# Altium PCB PCB.PcbDoc
Units mil, origin at the board's own origin, x right, y up, seen from the top; angles counter-clockwise.
Board outline 1885.08 x 820.03 mil, 2 copper layers (Top Layer, Bottom Layer); 23 components, 13 nets, 65 pads, 4 vias.
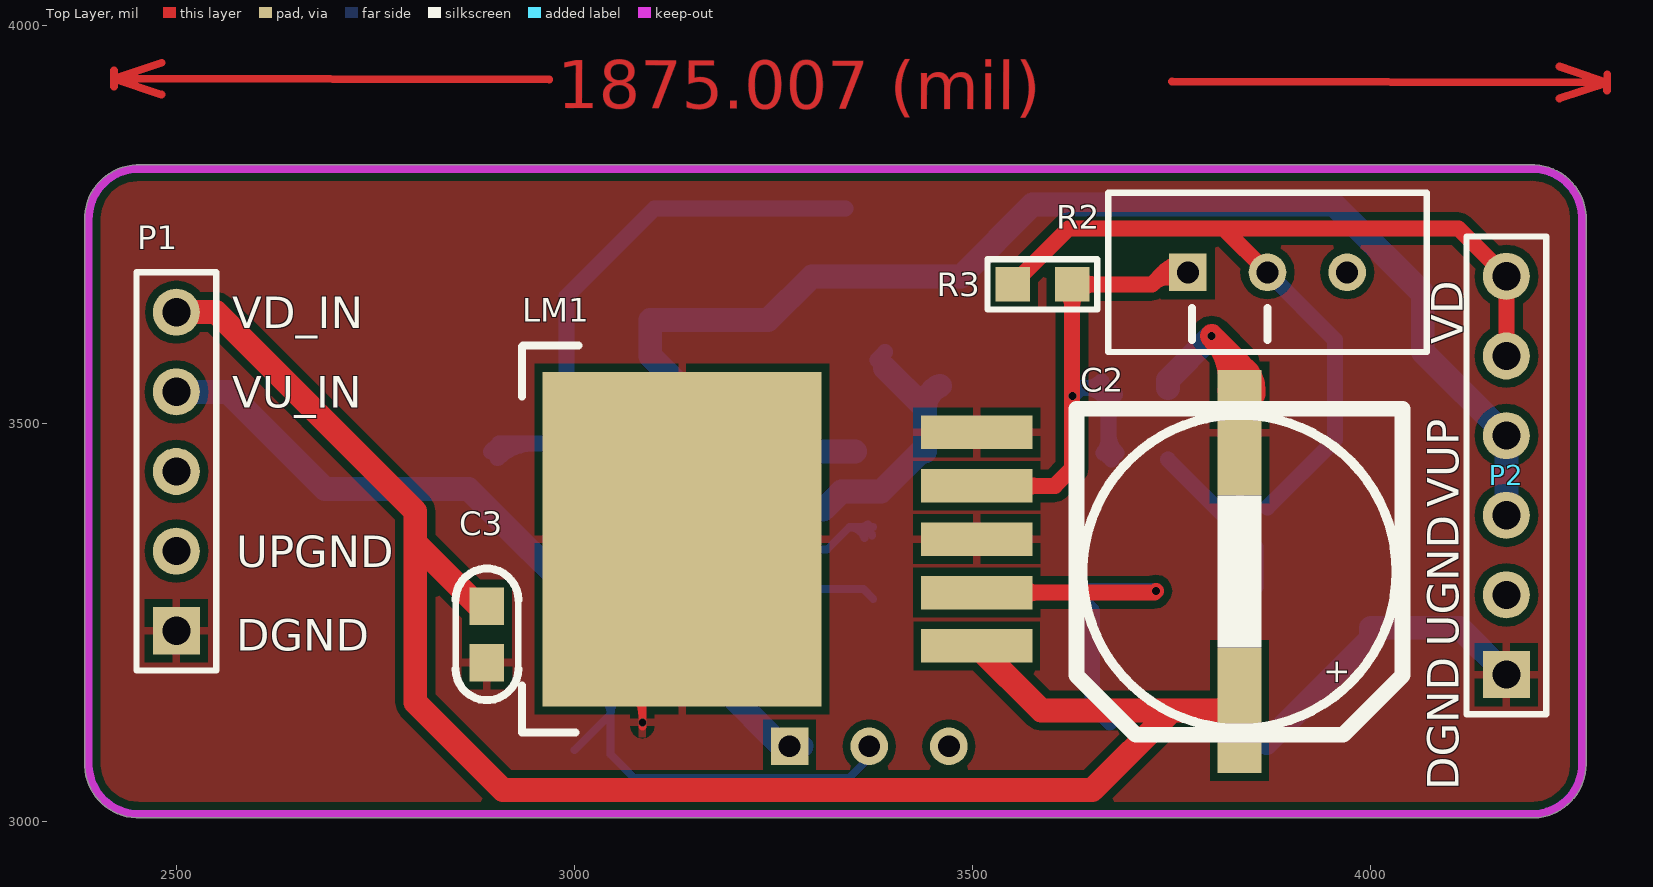
[diagram p0: Top Layer view]
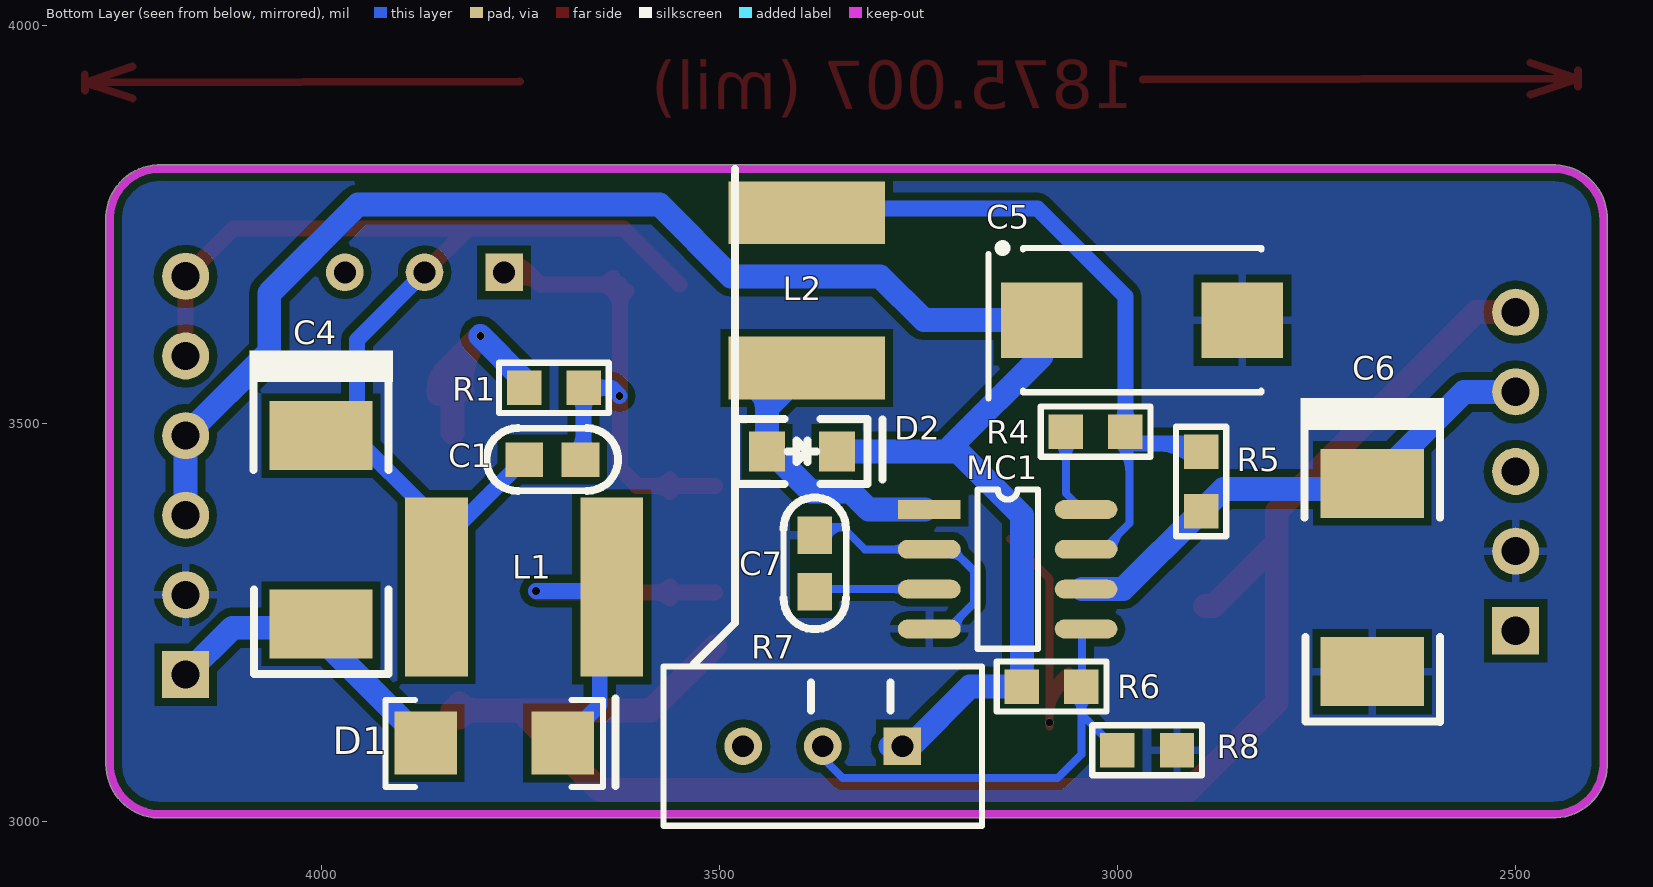
[diagram p1: Bottom Layer view, seen from below]

## Layer stack, top to bottom
Top Layer: signal copper 1.4
Dielectric: dielectric 12.6, FR-4, Dk 4.8
Bottom Layer: signal copper 1.4

## Board outline
2384.99,3070 2384.99,3754.9 cw(c2452.5,3757.5) 2449.8,3825.01 cw(c2450,3820) 2450,3825.01 4199.9,3825.01 cw(c4202.5,3757.5) 4270.01,3760.2 cw(c4265,3760) 4270.02,3760 4270.02,3075.1 cw(c4202.5,3072.5) 4270.06,3072.5 cw(c4202.5,3072.5) 4205.2,3004.99 cw(c4205,3010) 4205,3004.99 2455.1,3004.99 cw(c2452.5,3072.5) 2384.99,3069.8 cw(c2390,3070)

## Design rules (kind name [scope] priority, off if disabled: settings)
Clearance [All] p1: gap=10
PolygonConnect [All] p1: connectstyle=Relief reliefconductorwidth=10 reliefentries=4 polygonreliefangle="90 Angle" airgapwidth=10
RoutingVias [All] p1: holewidth=28 width=50 viastyle="Through Hole" minholewidth=28 minwidth=50 maxholewidth=28 maxwidth=50
SolderMaskExpansion [All] p1: expansion=4
Width [All] p1: maxlimit=50 minlimit=10 preferedwidth=10 minimp=50.000000 maximp=50.000000 favimp=50.000000
28 further rules are at their usual default settings.

## Components (designator, comment, footprint, x,y, rotation, side; value= is the part's Value field where it differs from the comment)
C1 "Cap" CAP-MLCC-0603 3745,3455 r0 bottom
C2 "Cap Pol3" SMD-EC-F10 3835,3140 r90 top
C3 "Cap" CAP-MLCC-0603 2890,3200 r270 top
C4 "Cap Pol3" 6032C 4000,3485 r90 bottom
C5 "Cap Pol" CAP-TAN-7343/CAPD 3095,3630 r180 bottom
C6 "Cap Pol" 6032C 2680,3425 r90 bottom
C7 "Cap" CAP-MLCC-0603 3380,3360 r90 bottom
D1 "Diode" SS34 3785,3095 r0 bottom
D2 "1N5819" 0805D 3440,3465 r180 bottom
L1 "Inductor" SMD 3730,3280 r0 bottom
L2 "Inductor" SMDL52 3390,3640 r90 bottom
LM1 "LM2596" TO-263-5 3320,3355 r90 top
MC1 "MC34063" LT1963-SOP8 3210,3075 r180 bottom
P1 "Header 5" HDR1X5 2500,3240 r90 top
P2 "Header 6" HDR1X6 4170,3185 r90 top
R1 "Res1" RES-0603 3745,3545 r0 bottom
R2 "RPot" VR5 3870,3690 r0 top
R3 "Res1" RES-0603 3550,3675 r180 top
R4 "Res1" RES-0603 2990,3490 r180 bottom
R5 "Res1" RES-0603 2895,3390 r270 bottom
R6 "Res1" RES-0603 3120,3170 r0 bottom
R7 "RPot" VR5 3370,3095 r0 bottom
R8 "Res1" RES-0603 3000,3090 r0 bottom

## Footprints (in the part's own frame and the unit in brackets; to place one, negate y for a bottom-side part, rotate by r counter-clockwise, add the part's x,y. Pads: shape width x height; smd on the part's side, far side on the other; paste and mask are expansions set on the pad)
0805D [mil]
  rect 45x50 smd: A(0,0) K(88,0)
  silkscreen extent -39,-41 126,41
6032C [mm]
  rect 2.2x3.3 smd: 1(0,0) 2(-6,0)
  silkscreen extent -7.6,-2.29 2.72,2.28
CAP-MLCC-0603 [mm]
  rect 1.2x1.1 smd: 1(0,0) 2(-1.8,0)
  silkscreen extent -3,-1 1.2,1, body extent -1.77,-0.47 -0.02,0.48, height 0.85
CAP-TAN-7343/CAPD [mm]
  rect 2.6x2.4 smd: 1(0,0) 2(6.4,0)
  silkscreen extent -1.7,-2.5 7,2.42
HDR1X5 [mm] "Connector; Header; 5 Position"
  rect 1.5x1.5 hole 0.9: 1(0,0)
  round 1.5 hole 0.9: 2(2.54,0) 3(5.08,0) 4(7.62,0) 5(10.16,0)
  silkscreen extent -1.27,-1.27 11.43,1.27
HDR1X6 [mm] "Connector; Header; 5 Position"
  rect 1.5x1.5 hole 0.9: 1(0,0)
  round 1.5 hole 0.9: 2(2.54,0) 3(5.08,0) 4(7.62,0) 5(10.16,0) 6(12.7,0)
  silkscreen extent -1.27,-1.27 13.97,1.27
LT1963-SOP8 [mm]
  rect 2x0.6 smd: 1(-0.667,8.059)
  oval 2x0.6 smd: 2(-0.667,6.789) 3(-0.667,5.519) 4(-0.667,4.249) 5(4.333,4.249) 6(4.333,5.519) 7(4.333,6.789) 8(4.333,8.059)
  silkscreen extent 0.87,3.61 2.8,8.69
RES-0603 [mm]
  rect 1.1x1.1 smd: 1(0,0) 2(-1.9,0)
  silkscreen extent -2.7,-0.8 0.8,0.8, body extent -1.8,-0.47 -0.1,0.48, height 0.6
SMD [mm]
  rect 2x5.7 smd: 1(-2.413,-0.381) 2(3.175,-0.381)
SMD-EC-F10 [mm]
  rect 4x1.4 smd: 1(0,0) 2(8.86,0)
  silkscreen extent -0.78,-5.2 9.62,5.2
SMDL52 [mm]
  rect 2x5 smd: 1(-1.778,0) 2(3.175,0)
SS34 [mm]
  rect 2x2 smd: A(2.125,-0.102) K(-2.25,-0.102)
  silkscreen extent -3.94,-1.52 3.4,1.3, body extent -2.48,-1.48 2.37,1.3, height 1.4
TO-263-5 [mil]
  rect 42x140 smd: 1(-134,-185) 2(-67,-185) 3(0,-185) 4(67,-185) 5(134,-185)
  rect 420x350 smd: 3(0,185)
  silkscreen extent -243,315 243,386
VR5 [mm] "Variable Resistor, Thru-Hole; 3 Leads"
  rect 1.2x1.2 hole 0.7: 1(-2.54,0)
  round 1.2 hole 0.7: 2(0,0) 3(2.54,0)
  silkscreen extent -5.08,-2.54 5.08,2.54

## Part data
C1 C3 C7: "Capacitor"
C2 C4: "Polarized Capacitor (Surface Mount)"
C5 C6: "Polarized Capacitor (Radial)"
D2: library part D-MBRA140T3, "MBRA140T3"
LM1: "12-5"
P1: "Header, 5-Pin"
P2: "Header, 6-Pin"
R1 R3 R4 R5 R6 R8: "Resistor"
R2 R7: "Potentiometer"

## Via types
v1: diameter 10, hole 10, Top Layer to Bottom Layer, 4 vias

## Nets (pads, with @x,y where several pads share a name; then routed paths per layer and width w, separated by ;. In a path a pad name is that pad's centre, name@x,y a point inside that pad or via, vN(x,y) a via of type N, cw(c..) or ccw(c..) an arc to the next point about the centre after c; other vN are vias at no path point)
DGND: C2.2 C3.1 C4.2 D1.A LM1.3 LM1.5 P1.1 P2.1 R1.1 | length 1138.6
  Top Layer w10: LM1.3@3055.99,3180.87 cw(c3027.69,3131.03) 3085,3131.03 ; LM1.3@3060.93,3189.57 cw(c3037.44,3148.21) LM1.3@3085,3148.21 ; 3085,3120 3085,3305 LM1.3@3135,3355
  Top Layer w30: C2.2@3822.57,3541.81 ccw(c3743.45,3553.45) v1(3800,3610) 3835,3575 C2.2 ; C2.2@3826.12,3548.86 ccw(c3804.68,3570.3) 3835,3570.3 ccw(c3865.32,3570.3) C2.2@3843.88,3548.86 ; 3842.21,3567.79 cw(c3817.05,3542.62) C2.2@3852.26,3537.45
  Bottom Layer w30: R1.1 3745,3555 v1(3800,3610) ; D1.A 4000,3230.35 4000,3243.78 4111.22,3243.78 P2.1
  other v1: 3085,3125
NetC1_2: C1.2 LM1.4 R1.2 R2.1 R3.2 | length 1034.6
  Top Layer w20: LM1.4 3603,3422 3624.8,3443.8 R3.2 3725,3675 ; LM1.4@3561.78,3414.22 cw(c3580.56,3395.44) 3580.56,3422 cw(c3580.56,3448.56) LM1.4@3561.78,3429.78 ; R3.2@3616.56,3666.76 cw(c3596.67,3646.87) 3624.8,3646.87 cw(c3652.94,3646.87) 3633.04,3666.76 cw(c3652.94,3646.87) 3652.94,3675 cw(c3652.94,3703.13) R3.2@3633.04,3683.24 ; 3742.22,3692.22 cw(c3759.76,3674.69) R2.1@3773.55,3695.3 ; R2.1@3759.74,3681.04 ccw(c3740,3663.78) 3740,3690 ; R2.1@3759.74,3698.96 cw(c3740,3716.22) 3740,3690 ; R2.1@3762.43,3678.68 ccw(c3745.95,3654.05) 3725,3675 ; R2.1 3740,3690 ; 3725,3675 3740,3690
  Bottom Layer w20: v1(3625,3535) 3635,3545 R1.2 3670.2,3458.94 C1.2 ; R1.2@3661.96,3553.24 cw(c3642.06,3573.13) 3642.06,3545 cw(c3642.06,3516.87) 3661.96,3536.76 cw(c3642.06,3516.87) 3670.2,3516.87 cw(c3698.33,3516.87) R1.2@3678.44,3536.76 ; C1.2@3663.93,3463.24 ccw(c3648.78,3478.38) 3670.2,3478.38 ; 3670.2,3487.89 ccw(c3705.05,3487.89) C1.2@3680.41,3463.24
NetC7_2: C7.2 MC1.3 | length 164.7
  Bottom Layer w10: MC1.3@3241.26,3292.28 3362.72,3292.28 C7.2@3375,3280 ; MC1.3@3268.64,3287.47 cw(c3280.26,3275.84) 3280.26,3292.28 cw(c3280.26,3308.73) MC1.3@3268.64,3297.1
NetD1_K: D1.K L1.1 LM1.2 | length 545.5
  Top Layer w20: LM1.2 3728,3288 v1(3730,3290) ; LM1.2@3561.78,3280.22 cw(c3580.56,3261.44) 3580.56,3288 cw(c3580.56,3314.56) LM1.2@3561.78,3295.78
  Bottom Layer w20: L1.1@3627.5,3287.5 3650,3265 3650,3147 D1.K@3672,3125 ; L1.1 3640,3290 v1(3730,3290)
NetD2_A: D2.A L2.1 MC1.1 | length 404.7
  Bottom Layer w20: L2.1@3380,3580 L2.1@3390,3590
  Bottom Layer w30: MC1.1@3241.26,3392.28 3312.28,3392.28 3335,3415 3384.86,3415 3434.86,3465 D2.A 3440,3520 L2.1 ; 3440,3519.19 cw(c3470.96,3519.19) L2.1@3458.7,3547.62
NetL2_2: L2.2 MC1.7 R4.1 R5.2 | length 1054.6
  Bottom Layer w10: R4.1@2978.22,3478.22 cw(c2961.87,3461.87) 2985,3461.87 cw(c3018.13,3461.87) R4.1@2994.7,3485.3 ; 2985,3437.72 cw(c3042.28,3437.72) R4.1@3001.78,3478.22 ; R4.1@2985,3475 2985,3375 3017.72,3342.28 MC1.7@3044.41,3342.28 ; 2996.08,3363.92 cw(c2974.43,3342.28) MC1.7@3005.04,3342.28
  Bottom Layer w20: R5.2 2905.2,3475 R4.1@2985,3475 ; R5.2@2903.24,3456.56 cw(c2947.75,3412.05) 2947.75,3475 ; R4.1@2981.76,3498.24 ccw(c2961.87,3518.13) 2990,3518.13 ccw(c3018.13,3518.13) R4.1@2998.24,3498.24 ; R4.1@2990,3475 2990,3660 3100,3770 L2.2@3340,3770
NetMC1_5: MC1.5 R6.2 R7.2 R8.1 | length 640.2
  Bottom Layer w10: R8.1 3045.2,3135.2 ; R6.2@3034.75,3157.03 cw(c3017.16,3135.2) 3045.2,3135.2 ; R6.2@3044.41,3170 MC1.5@3044.41,3242.28 ; R6.2 3045.2,3135.2 ; R6.2@3055.64,3157.03 ccw(c3073.23,3135.2) 3045.2,3135.2 ; R7.2@3385,3095 3345,3055 3075,3055 3045.2,3084.8 3045.2,3135.2
NetMC1_8: MC1.8 R4.2 | length 154.3
  Bottom Layer w10: MC1.8@3044.41,3392.28 3064.8,3412.68 R4.2@3064.8,3475 ; R4.2@3053.03,3478.22 cw(c3024.6,3449.79) 3064.8,3449.79 cw(c3105.01,3449.79) R4.2@3076.58,3478.22
UPGND: C5.2 C6.2 C7.1 MC1.2 MC1.4 P1.2 P2.2 R8.2 | length 459
  Bottom Layer w10: 3194.23,3260.77 cw(c3175.75,3242.28) MC1.4@3201.89,3242.28 ; 3194.65,3329.65 cw(c3208.7,3315.61) MC1.2@3208.7,3335.47 ; 3198.08,3333.08 ccw(c3188.87,3342.28) MC1.2@3201.89,3342.28 ; MC1.4@3241.26,3242.28 3212.72,3242.28 3180,3275 3180,3315 3207.28,3342.28 3241.26,3342.28 3317.28,3342.28 3345,3370 ; MC1.2@3268.64,3337.47 cw(c3280.26,3325.84) 3280.26,3342.28 cw(c3280.26,3358.73) MC1.2@3268.64,3347.1 ; C7.1@3364.31,3356.38 ccw(c3345,3349.5) 3345,3370 ; C7.1@3368.22,3373.74 cw(c3359.18,3382.78) 3359.18,3370 cw(c3359.18,3354.55) C7.1@3373.73,3359.74 ; C7.1@3375,3370 3345,3370
VD_IN: C2.1 C3.2 LM1.1 P1.5 | length 2214.5
  Top Layer w30: P1.5 2550,3640 2800,3390 2800,3350 ; C3.2 2879.13,3270.87 2800,3350 ; LM1.1 3586,3140 3750,3140 ; C2.1@3826.12,3131.12 ccw(c3804.68,3109.68) 3804.68,3140 ccw(c3804.68,3170.32) C2.1@3826.12,3148.88 ; C2.1 3750,3140 ; 2800,3350 2800,3150 2910,3040 3650,3040 3750,3140
VDOWN: C1.1 C4.1 L1.2 P2.5 P2.6 R2.2 R3.1 | length 1422.6
  Top Layer w20: R3.1 3620,3745 3815,3745 ; R2.2 3815,3745 ; P2.5 P2.6 4110,3745 3815,3745
  Bottom Layer w20: C1.1 3855,3345 L1.2 ; L1.2@3870,3395 3955,3480 3955,3605 R2.2
VUP: C5.1 D2.K P2.3 P2.4 R6.1 R7.1 | length 2289.3
  Bottom Layer w30: 3200,3465 D2.K ; R7.1@3285,3095 3260,3095 3185,3170 R6.1 3120,3385 3207.5,3472.5 3095,3585 C5.1 3242.89,3630 3297.89,3685 3485,3685 3575,3775 3953.76,3775 4065,3663.76 4065,3590 P2.4 P2.3
VUP_IN: C6.1 MC1.6 P1.4 R5.1 | length 647
  Bottom Layer w30: P1.4 2565,3540 C6.1 2686.85,3418.15 2866.85,3418.15 R5.1 2992.72,3292.28 MC1.6@3044.41,3292.28
pads on no net: P1.3 R2.3 R7.3
copper on no net: | length 1386.2
  Top Layer w10: 2421.57,3923.34 2421.62,3943.34 ; 2481.54,3913.18 2421.6,3933.34 ; 2481.65,3953.18 2421.6,3933.34 ; 2968.22,3931.88 2421.6,3933.34 ; 3749.98,3929.8 4296.6,3928.34 ; 4236.55,3908.5 4296.6,3928.34 ; 4236.65,3948.5 4296.6,3928.34 ; 4296.57,3918.34 4296.62,3938.34

## Polygon pours and split planes (outlines as drawn)
DGND on Top Layer "Bottom Layer-No Net" (solid, remove dead copper, pour order 8): 2287.91,3864 2267.91,3844 2267.91,2939 4547.91,2939 4582.91,2904 4487.91,2999 4487.91,3909
UPGND on Bottom Layer "Bottom Layer-No Net" (solid, remove dead copper, pour order 14): 2260.12,4065.01 4555.12,4065.01 4605.12,4015.01 4620.12,4000.01 4620.12,2875.01 2315.12,2875.01 2205.12,2985.01

## Keep-outs
Keep-Out Layer:
  lines w10: 2390,3755 cw(c2452.5,3757.5) 2450,3820 4200,3820 cw(c4202.5,3757.5) 4265,3760 4265,3070 ; 2390,3760 2390,3070 ccw(c2452.5,3072.5) 2455,3010 4205,3010 ccw(c4202.5,3072.5) 4265,3075

## Other copper
Top Layer:
  text "1875.007 (mil)" at 2978.12,3895.87 h60 r359.85

## Silkscreen, mask and mechanical layers (free items; w line width, h text height)
Top Overlay:
  lines w10: 3775,3605 3775,3645 ; 3870,3605 3870,3645
  text "VD_IN" at 2570,3620 h40
  text "VD" at 4115,3600 h40 r90
  text "VU_IN" at 2570,3520 h40
  text "VUP" at 4110,3395 h40 r90
  text "UPGND" at 2575,3320 h40
  text "UGND" at 4110,3220 h40 r90
  text "DGND" at 2575,3215 h40
  text "DGND" at 4110,3040 h40 r90
Bottom Overlay:
  lines w10: 3285,3140 3285,3175 ; 3295,3430 3295,3505 ; 3385,3140 3385,3175 ; 3480,3570 3480,3820 ; 3480,3580 3480,3250 3532.5,3197.5

## Text inside footprints (layer, text, board x,y; h text height)
C2: Top Overlay "+" at 3970.43,3170.72 h30 r90